# Altium PCB PCB1.PcbDoc
Units mm, origin at the board's own origin, x right, y up, seen from the top; angles counter-clockwise.
Board outline 25 x 17 mm, 2 copper layers (Top Layer, Bottom Layer); 9 components, 6 nets, 20 pads, 4 vias.
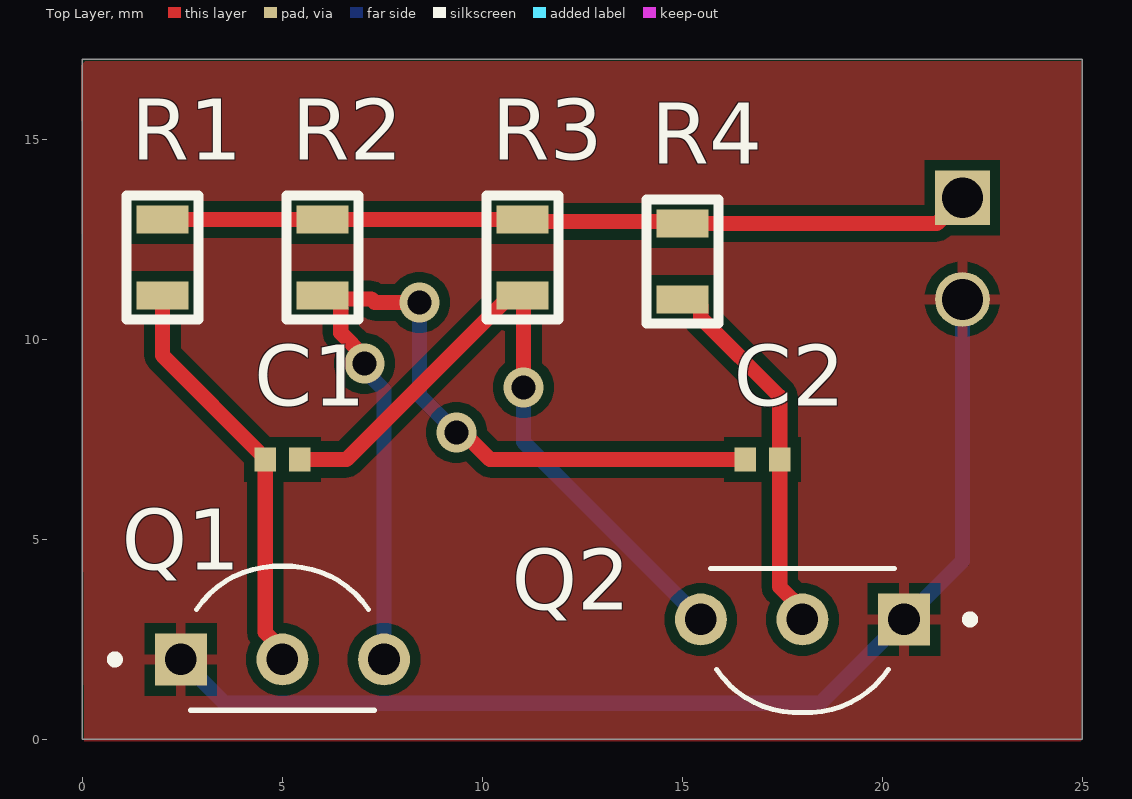
[diagram p0: Top Layer view]
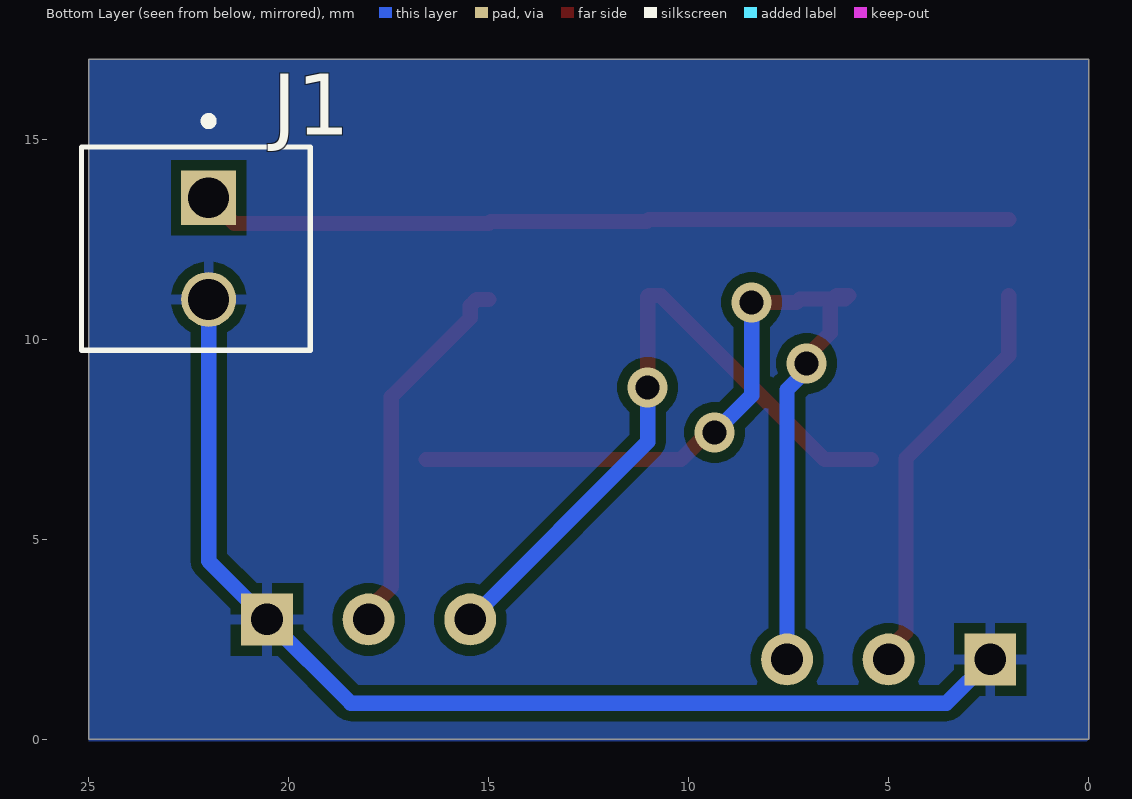
[diagram p1: Bottom Layer view, seen from below]
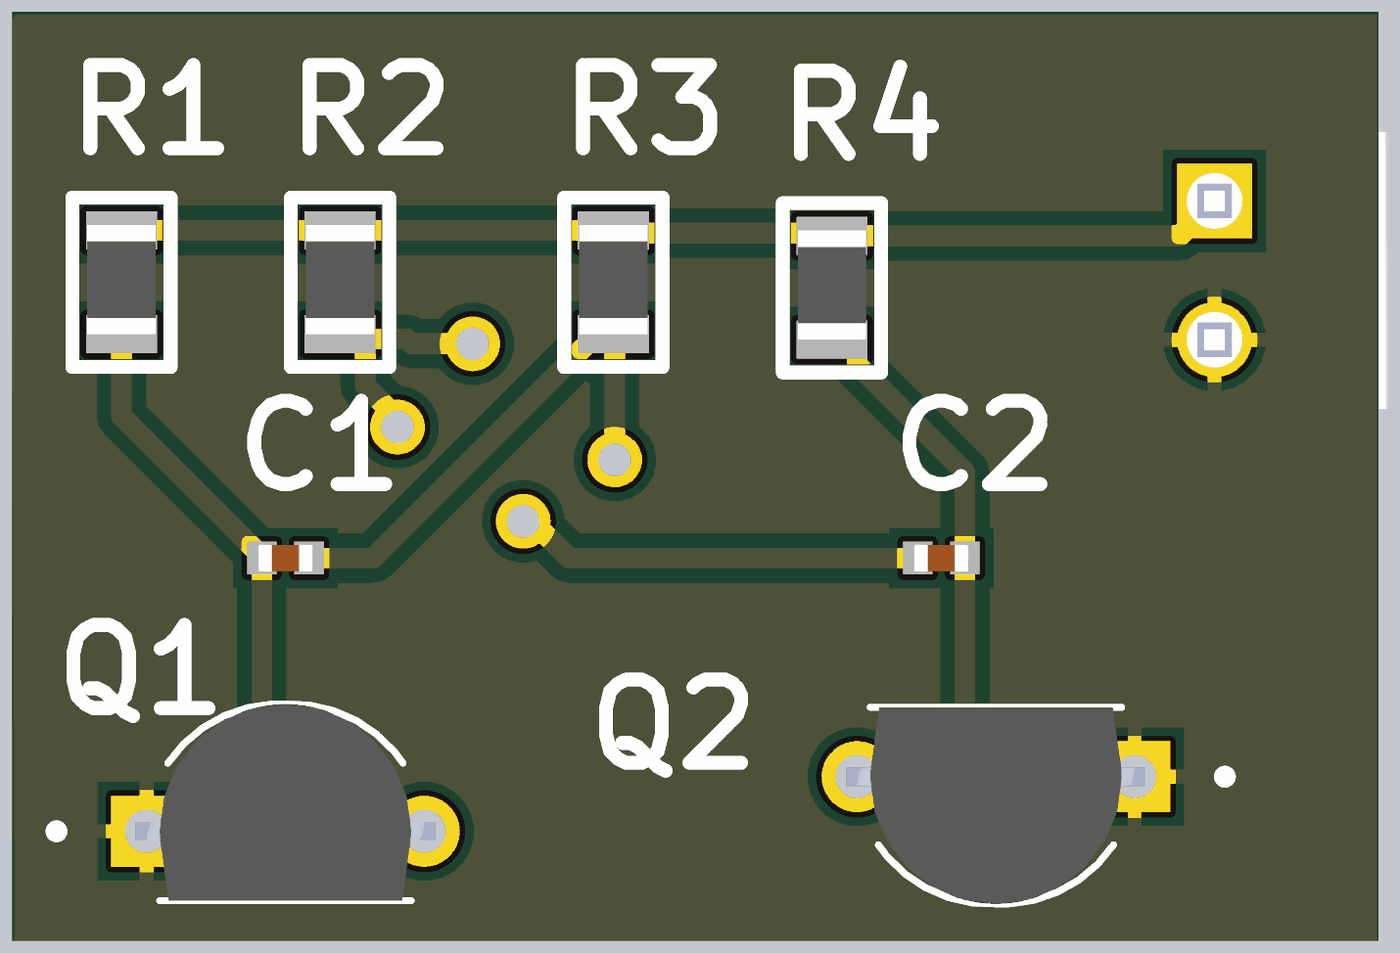
[diagram p2: 3D render of the assembled board from above, using the file's embedded part models]

## Layer stack, top to bottom
Top Solder: solder mask 0.0102, Solder Resist, Dk 3.5
Top Layer: signal copper 0.0356
Dielectric 1: dielectric 0.32, FR-4, Dk 4.8
Bottom Layer: signal copper 0.0356
Bottom Solder: solder mask 0.0102, Solder Resist, Dk 3.5

## Board outline
0,0 25,0 25,17 0,17

## Design rules (kind name [scope] priority, off if disabled: settings)
Clearance [All] p1: gap=0.254 ignorepadtopadclearanceinfootprint=FALSE except(0.3: Arc-Arc Arc-Track Track-Track)
PolygonConnect [All] p1: connectstyle=Relief reliefconductorwidth=0.254 reliefentries=4 polygonreliefangle="90 Angle" airgapwidth=0.254
RoutingVias [All] p1: holewidth=0.6 width=1 viastyle="Through Hole" minholewidth=0.4 minwidth=0.7 maxholewidth=0.711 maxwidth=1.27
SolderMaskExpansion [All] p1: expansion=0.102 istentingtop=FALSE
SupplyNets "Schematic Supply Nets" [InNet('GND')] p1: voltage=0.000
Width [All] p1: maxlimit=1 minlimit=0.1 preferedwidth=0.254
30 further rules are at their usual default settings.

## Components (designator, comment, footprint, x,y, rotation, side; value= is the part's Value field where it differs from the comment)
C1 "GCM155R71H104KE37D" CAPC1005X55N 5,7 r0 top
C2 "GCM155R71H104KE37D" CAPC1005X55N 17,7 r0 top
J1 "640456-2" TE_640456-2 22,13.54 r90 bottom
Q1 "2N3904" TO92254P460H750-3 5,2 r0 top
Q2 "2N3904" TO92254P460H750-3 18,3 r180 top
R1 "Res" "Res 0805" 2,11.1 r90 top
R2 "Res" "Res 0805" 6,11.1 r90 top
R3 "Res" "Res 0805" 11,11.1 r90 top
R4 "Res" "Res 0805" 15,11 r90 top

## Footprints (in the part's own frame and the unit in brackets; to place one, negate y for a bottom-side part, rotate by r counter-clockwise, add the part's x,y. Pads: shape width x height; smd on the part's side, far side on the other; paste and mask are expansions set on the pad)
CAPC1005X55N [mm]
  rect 0.54x0.6 smd: 1(-0.432,0) 2(0.432,0)
  body extent -0.5,-0.25 0.5,0.25, height 0.55
"Res 0805" [mm]
  rect 0.7x1.3 smd: 1(0,0) 2(1.9,0)
  silkscreen extent -0.6,-0.9 2.5,0.9, body extent 0,-0.63 2,0.63, height 0.65
TE_640456-2 [mm]
  rect 1.37x1.37 / inner round 1.37 / far side rect 1.37x1.37 hole 1.02: 1(0,0)
  round 1.37 hole 1.02: 2(-2.54,0)
  silkscreen extent -3.81,-2.54 2.02,3.18, body extent -3.81,-2.54 1.27,3.18, height 10.03
TO92254P460H750-3 [mm]
  rect 1.298x1.298 / inner round 1.298 / far side rect 1.298x1.298 hole 0.79: 1(-2.54,0)
  round 1.298 hole 0.79: 2(0,0) 3(2.54,0)
  silkscreen extent -4.29,-1.27 2.3,2.33, body extent -2.74,-1.27 2.74,2.33, height 8.09

## Part data
C1 C2: "Multilayer Ceramic Capacitors MLCC - SMD/SMT", Package="1005-2 MURATA", Check_prices=https://www.snapeda.com/parts/GCM155R71H104KE37D/Murata/view-part/?ref=eda, MF=Murata, MP=GCM155R71H104KE37D, SnapEDA_Link=https://www.snapeda.com/parts/GCM155R71H104KE37D/Murata/view-part/?ref=snap
J1: "Header Friction Lock MTA-100 2 250 VAC Polyester Tin Copper Alloy Tin", Package=None, Check_prices=https://www.snapeda.com/parts/640456-2/TE+Connectivity+AMP+Connectors/view-part/?ref=eda, MF="TE Connectivity", MP=640456-2, SnapEDA_Link=https://www.snapeda.com/parts/640456-2/TE+Connectivity+AMP+Connectors/view-part/?ref=snap
Q1 Q2: "BJT, TO-92, 40V, 200mA, NPN, 0.625W, 150Â°C", Package="TO-92 Diotec", Check_prices=https://www.snapeda.com/parts/2N3904/Diotec/view-part/?ref=eda, MF="Diotec Semiconductor", MP=2N3904, SnapEDA_Link=https://www.snapeda.com/parts/2N3904/Diotec/view-part/?ref=snap

## Via types
v1: diameter 1, hole 0.6, Top Layer to Bottom Layer, 4 vias

## Nets (pads, with @x,y where several pads share a name; then routed paths per layer and width w, separated by ;. In a path a pad name is that pad's centre, name@x,y a point inside that pad or via, vN(x,y) a via of type N, cw(c..) or ccw(c..) an arc to the next point about the centre after c; other vN are vias at no path point)
+12V: J1.1 R1.2 R2.2 R3.2 R4.2 | length 20.3
  Top Layer w0.381: R1.2 R2.2 R3.2 11.05,12.95 14.95,12.95 R4.2 21.36,12.9 J1.1
GND: J1.2 Q1.1 Q2.1 | length 28
  Bottom Layer w0.381: Q1.1 3.554,0.907 18.447,0.907 Q2.1 22,4.46 J1.2
NetC1_1: C1.1 Q1.2 R1.1 | length 10.3
  Top Layer w0.381: R1.1 2,9.598 4.568,7.03 C1.1 4.568,2.68 5,2.248 Q1.2
NetC1_2: C1.2 Q2.3 R3.1 | length 17.2
  Top Layer w0.381: C1.2 6.6,7 10.7,11.1 R3.1 11.025,11.075 v1(11.025,8.8)
  Bottom Layer w0.381: v1(11.025,8.8) 11.025,7.435 Q2.3
NetC2_1: C2.1 Q1.3 R2.1 | length 23.5
  Top Layer w0.381: v1(7.05,9.4) 7.05,9.567 6.46,10.158 6.46,10.94 6.3,11.1 R2.1 6.089,11.011 7.222,11.011 7.307,10.925 v1(8.425,10.925) ; v1(9.35,7.675) 9.515,7.675 10.19,7 C2.1
  Bottom Layer w0.381: v1(7.05,9.4) 7.05,9.232 7.54,8.742 Q1.3 ; v1(8.425,10.925) 8.425,8.6 v1(9.35,7.675)
NetC2_2: C2.2 Q2.2 R4.1 | length 9.4
  Top Layer w0.381: R4.1 15.3,11 15.46,10.84 15.46,10.54 17.432,8.568 C2.2 17.432,3.816 18,3.248 Q2.2

## Polygon pours and split planes (outlines as drawn)
GND on Top Layer "GND_L01_P000" (solid, pour order 0): -0.025,16.975 0,16.95 24.975,16.95 24.975,-0.025 24.95,-0.05 0.05,-0.05
GND on Bottom Layer "GND_L02_P001" (solid, pour order 1): 0,17 24.975,17 25,17.025 25,-0.05 -0.025,-0.05

## Silkscreen, mask and mechanical layers (free items; w line width, h text height)
Mechanical 1:
  the board outline again, w0.254